# Altium PCB Main.PcbDoc
Units mil, origin at the board's own origin, x right, y up, seen from the top; angles counter-clockwise.
Board outline 2080 x 2080 mil, 2 copper layers (Top Layer, Bottom Layer), stack 12.8 mil thick; 114 components, 76 nets, 361 pads, 44 vias.
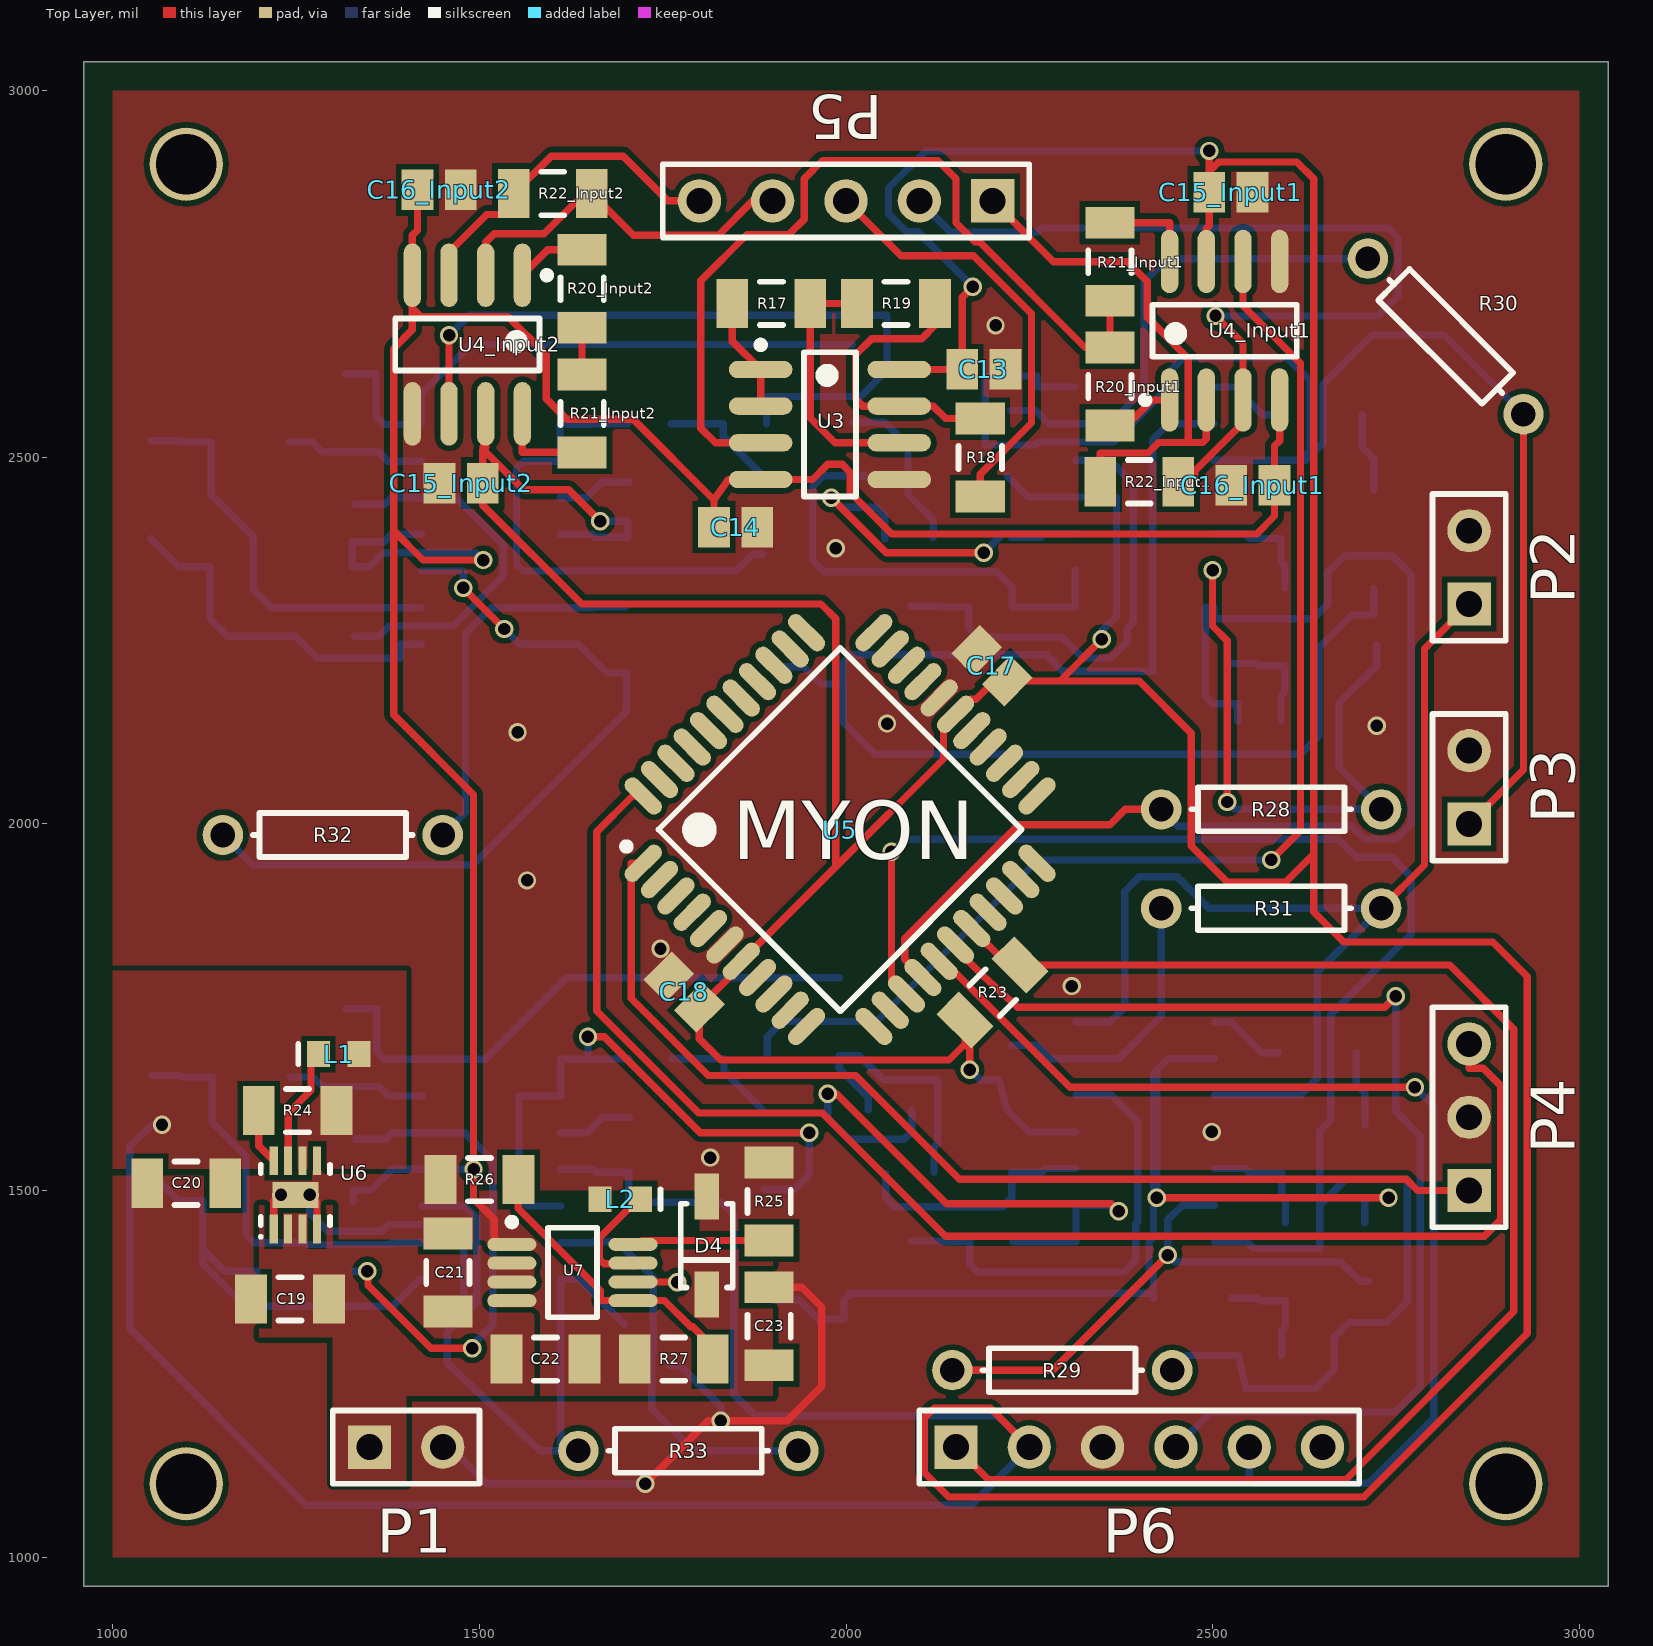
[diagram p0: Top Layer view]
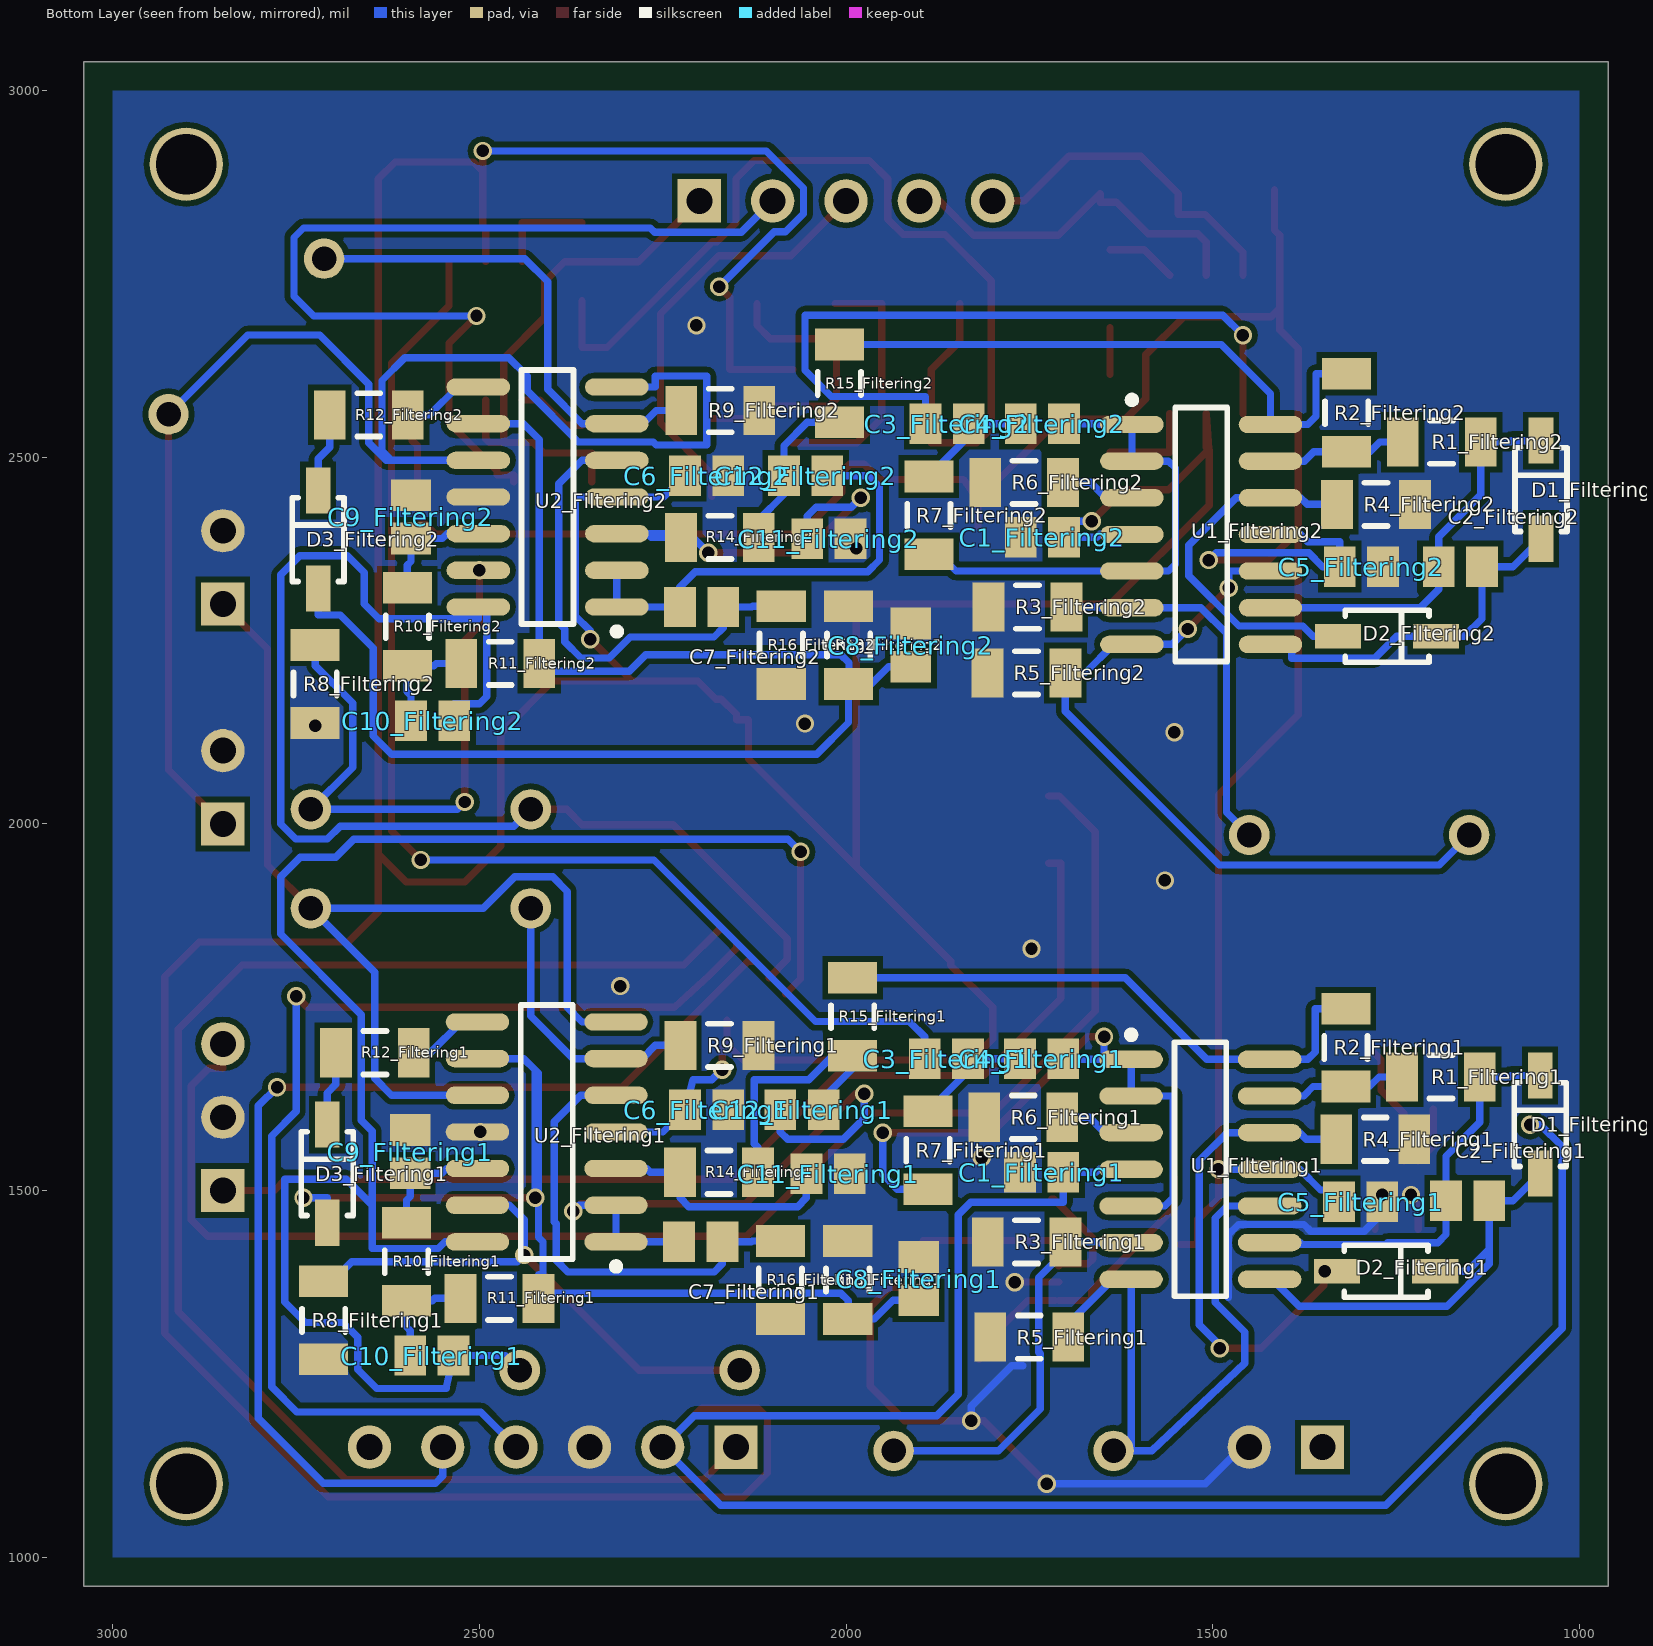
[diagram p1: Bottom Layer view, seen from below]

## Layer stack, top to bottom
Top Solder: solder mask 0.4, Solder Resist, Dk 3.5
Top Layer: signal copper 1.4
Dielectric 1: core 10, FR-4, Dk 4.2
Bottom Layer: signal copper 1.4
Solder Side: solder mask 0.4, Solder Resist, Dk 3.5

## Board outline
960,960 3040,960 3040,3040 960,3040

## Design rules (kind name [scope] priority, off if disabled: settings)
Clearance [All] p1: gap=7.5
ComponentClearance [All] p1: gap=10 collisioncheckmode=3 verticalgap=100000 showdistances=FALSE
ComponentOrientations [All] p1: allowedrotations=32
HoleSize [All] p1: absolutevalues=TRUE maxlimit=150 minlimit=1 maxpercent=80.000 minpercent=20.000
MinimumSolderMaskSliver [All] p1: minsoldermaskwidth=1
NetsToIgnore [InNet('No Net')] p1:
PermittedLayers [All] p1: toplayerpermitted=TRUE bottomlayerpermitted=TRUE
PlaneConnect [All] p1: planeconnectstyle=Direct reliefexpansion=20 reliefentries=4 reliefconductorwidth=10 reliefairgap=10
PolygonConnect [All] p1: connectstyle=Direct reliefconductorwidth=10 reliefentries=4 polygonreliefangle="90 Angle" airgapwidth=10
RoomDefinition Filtering1 [InComponentClass('Filtering1')] p1: confinementstyle=ConfineIn formatcopy=TRUE lockcomponents=FALSE outline 2765,1235 995,1235 995,1825 2765,1825
RoomDefinition Filtering2 [InComponentClass('Filtering2')] p2: confinementstyle=ConfineIn formatcopy=TRUE lockcomponents=FALSE outline 2763.89,2101 993.89,2101 993.89,2691 2763.89,2691
RoomDefinition Pos [InComponentClass('Pos')] p3: confinementstyle=ConfineIn formatcopy=TRUE lockcomponents=FALSE outline 1392,1302.32 1392,1719 1015,1719 1015,1302.32
RoomDefinition Neg [InComponentClass('Neg')] p4: confinementstyle=ConfineIn formatcopy=TRUE lockcomponents=FALSE outline 1410,1225 1945,1225 1945,1570 1410,1570
RoomDefinition Main [InComponentClass('Main')] p5: confinementstyle=ConfineOut formatcopy=TRUE lockcomponents=FALSE outline 3030,2094 3070,2094 3070,2812 3030,2812
RoomDefinition Input2 [InComponentClass('Input2')] p6: confinementstyle=ConfineIn formatcopy=TRUE lockcomponents=FALSE outline 1370,2910 1370,2425 1690,2425 1690,2910
RoomDefinition Input1 [InComponentClass('Input1')] p7: confinementstyle=ConfineIn formatcopy=TRUE lockcomponents=FALSE outline 2630,2416.85 2630,2901.85 2310,2901.85 2310,2416.85
RoomDefinition Drive [InComponentClass('Drive')] p8: confinementstyle=ConfineIn formatcopy=TRUE lockcomponents=FALSE outline 1748.15,2360 2253.15,2360 2253.15,2769 1748.15,2769
RoomDefinition Digital [InComponentClass('Digital')] p9: confinementstyle=ConfineIn formatcopy=TRUE lockcomponents=FALSE outline 1604.12,1610.88 2374.12,1610.88 2374.12,2380.88 1604.12,2380.88
RoutingVias [All] p1: holewidth=17 width=25 viastyle="Through Hole" minholewidth=17 minwidth=25 maxholewidth=17 maxwidth=25
SMDNeckDown [All] p1: percent=100.000
SilkToSilkClearance [All] p1: silktosilkclearance=2
SilkToSolderMaskClearance [IsPad] p1 off: minsilkscreentomaskgap=5 clearancetoexposedcopper=TRUE
SolderMaskExpansion [All] p1: expansion=4
ViasUnderSMD [All] p1: allowed=TRUE
Width [All] p1: maxlimit=20 minlimit=10 preferedwidth=10 minimp=50.000000 maximp=50.000000 favimp=50.000000
24 further rules are at their usual default settings.

## Classes and differential pairs
component class Drive: C13 C14 R17 R18 R19 U3
net class AI[1..2]: AI1 AI2
component class Neg: C21 C22 C23 C24 D4 L2 R25 R26 R27 U7
component class Pos: C19 C20 L1 R24 U6
channel class Filtering: F1 F2
component class Main: P1 P2 P3 P4 P5 P6 R28 R29 R30 R31 R32 R33 Vpp1
component class Digital: C17 C18 C27 R23 U5 U11
component class Filtering1: C1_Filtering1 C2_Filtering1 C3_Filtering1 C4_Filtering1 C5_Filtering1 C6_Filtering1 C7_Filtering1 C8_Filtering1 C9_Filtering1 C10_Filtering1 C11_Filtering1 C12_Filtering1 D1_Filtering1 D2_Filtering1 D3_Filtering1 R1_Filtering1 R2_Filtering1 R3_Filtering1 R4_Filtering1 R5_Filtering1 R6_Filtering1 R7_Filtering1 R8_Filtering1 R9_Filtering1 R10_Filtering1 R11_Filtering1 R12_Filtering1 R13_Filtering1 R14_Filtering1 R15_Filtering1 R16_Filtering1 U1_Filtering1 U2_Filtering1
component class Filtering2: C1_Filtering2 C2_Filtering2 C3_Filtering2 C4_Filtering2 C5_Filtering2 C6_Filtering2 C7_Filtering2 C8_Filtering2 C9_Filtering2 C10_Filtering2 C11_Filtering2 C12_Filtering2 D1_Filtering2 D2_Filtering2 D3_Filtering2 R1_Filtering2 R2_Filtering2 R3_Filtering2 R4_Filtering2 R5_Filtering2 R6_Filtering2 R7_Filtering2 R8_Filtering2 R9_Filtering2 R10_Filtering2 R11_Filtering2 R12_Filtering2 R13_Filtering2 R14_Filtering2 R15_Filtering2 R16_Filtering2 U1_Filtering2 U2_Filtering2
component class Input1: C15_Input1 C16_Input1 R20_Input1 R21_Input1 R22_Input1 U4_Input1
component class Input2: C15_Input2 C16_Input2 R20_Input2 R21_Input2 R22_Input2 U4_Input2
net class AO[1..2]: AO1 AO2
net class DI[1..2]: DI1 DI2
net class LA[1..2]: LA1 LA2
net class LB[1..2]: LB1 LB2
channel class Input: Input1 Input2
net class LD[1..2]: LD1 LD2

## Components (designator, comment, footprint, x,y, rotation, side; value= is the part's Value field where it differs from the comment)
C1_Filtering1 "Cap" C0805 1733.15,1525 r0 bottom (schematic designator C1)
C1_Filtering2 "Cap" C0805 1732.04,2391 r0 bottom (schematic designator C1)
C2_Filtering1 "C20" C0805 1152,1486 r180 bottom (schematic designator C2)
C2_Filtering2 "C20" C0805 1162.04,2351 r180 bottom (schematic designator C2)
C3_Filtering1 "C15" C0805 1863.15,1680 r180 bottom (schematic designator C3)
C3_Filtering2 "C15" C0805 1862.04,2546 r180 bottom (schematic designator C3)
C4_Filtering1 "C16" C0805 1733.15,1680 r180 bottom (schematic designator C4)
C4_Filtering2 "C16" C0805 1732.04,2546 r180 bottom (schematic designator C4)
C5_Filtering1 "Cap" C0805 1298.15,1485 r180 bottom (schematic designator C5)
C5_Filtering2 "Cap" C0805 1297.04,2351 r180 bottom (schematic designator C5)
C6_Filtering1 "Cap" C0805 2190,1610 r0 bottom (schematic designator C6)
C6_Filtering2 "Cap" C0805 2190,2475 r0 bottom (schematic designator C6)
C7_Filtering1 "C19" C0805 2198.15,1430 r0 bottom (schematic designator C7)
C7_Filtering2 "C19" C0805 2197.04,2296 r0 bottom (schematic designator C7)
C8_Filtering1 "C23" C0805 1901,1380 r270 bottom (schematic designator C8)
C8_Filtering2 "C23" C0805 1911.51,2244 r270 bottom (schematic designator C8)
C9_Filtering1 "C21" C0805 2594.47,1553 r270 bottom (schematic designator C9)
C9_Filtering2 "C21" C0805 2593.36,2419 r270 bottom (schematic designator C9)
C10_Filtering1 "C22" C0805 2565,1275 r0 bottom (schematic designator C10)
C10_Filtering2 "C22" C0805 2563.89,2141 r0 bottom (schematic designator C10)
C11_Filtering1 "C21" C0805 2024.47,1523 r0 bottom (schematic designator C11)
C11_Filtering2 "C21" C0805 2023.36,2389 r0 bottom (schematic designator C11)
C12_Filtering1 "C22" C0805 2060,1610 r180 bottom (schematic designator C12)
C12_Filtering2 "C22" C0805 2055,2475 r0 bottom (schematic designator C12)
C13 "Cap" C0805 2188.15,2620 r180 top
C14 "Cap" C0805 1849.53,2405 r180 top
C15_Input1 "Cap" C0805 2525,2861.85 r180 top (schematic designator C15)
C15_Input2 "Cap" C0805 1475,2465 r0 top (schematic designator C15)
C16_Input1 "Cap" C0805 2555,2461.85 r0 top (schematic designator C16)
C16_Input2 "Cap" C0805 1445,2865 r180 top (schematic designator C16)
C17 "Cap" C0805 2199.12,2215.88 r315 top
C18 "Cap" C0805 1779.12,1770.88 r315 top
C19 "Cap" C1206 1241.61,1352.32 r0 top
C20 "Cap" C1206 1100,1510 r0 top
C21 "Cap" C1206 1456.85,1388.15 r90 top
C22 "Cap" C1206 1590,1270 r180 top
C23 "Cap" C1206 1895,1315 r90 top
D1_Filtering1 "D2" 425 1053.15,1590 r270 bottom (schematic designator D1)
D1_Filtering2 "D2" 425 1052.04,2456 r270 bottom (schematic designator D1)
D2_Filtering1 "D3" 425 1263.15,1390 r0 bottom (schematic designator D2)
D2_Filtering2 "D3" 425 1262.04,2256 r0 bottom (schematic designator D2)
D3_Filtering1 "D4" 425 2707.62,1523 r270 bottom (schematic designator D3)
D3_Filtering2 "D4" 425 2720,2388 r270 bottom (schematic designator D3)
D4 "D Schottky" 425 1810,1425 r90 top
L1 "Inductor" INDC1608L 1308,1686 r0 top
L2 "Inductor" INDC1608L 1691.85,1488.15 r180 top
P1 "9V" HDR1X2 1350,1150 r0 top
P2 "A1" HDR1X2 2850,2300 r90 top
P3 "A2" HDR1X2 2850,2000 r90 top
P4 "Do" HDR1X3 2850,1500 r90 top
P5 "Header" HDR1X5 2200,2850 r180 top
P6 "PICkit" HDR1X6 2150,1150 r0 top
R1_Filtering1 "R20" C1206 1188.62,1655 r180 bottom (schematic designator R1)
R1_Filtering2 "R20" C1206 1187.51,2521 r180 bottom (schematic designator R1)
R2_Filtering1 "R19" C1206 1318.15,1695 r270 bottom (schematic designator R2)
R2_Filtering2 "R19" C1206 1317.04,2561 r270 bottom (schematic designator R2)
R3_Filtering1 "R13" C1206 1753.62,1430 r180 bottom (schematic designator R3)
R3_Filtering2 "R13" C1206 1752.51,2296 r180 bottom (schematic designator R3)
R4_Filtering1 "R24" C1206 1278.15,1570 r0 bottom (schematic designator R4)
R4_Filtering2 "R24" C1206 1277.04,2436 r0 bottom (schematic designator R4)
R5_Filtering1 "R25" C1206 1750,1300 r180 bottom (schematic designator R5)
R5_Filtering2 "R25" C1206 1753.89,2206 r180 bottom (schematic designator R5)
R6_Filtering1 "R15" C1206 1758.15,1600 r180 bottom (schematic designator R6)
R6_Filtering2 "R15" C1206 1757.04,2466 r180 bottom (schematic designator R6)
R7_Filtering1 "R16" C1206 1888.15,1555 r90 bottom (schematic designator R7)
R7_Filtering2 "R16" C1206 1887.04,2421 r90 bottom (schematic designator R7)
R8_Filtering1 "R26" C1206 2712.62,1323 r90 bottom (schematic designator R8)
R8_Filtering2 "R26" C1206 2724,2191 r90 bottom (schematic designator R8)
R9_Filtering1 "R18" C1206 2172.62,1698 r0 bottom (schematic designator R9)
R9_Filtering2 "R18" C1206 2171.51,2564 r0 bottom (schematic designator R9)
R10_Filtering1 "R21" C1206 2599.47,1403 r90 bottom (schematic designator R10)
R10_Filtering2 "R21" C1206 2598.36,2269 r90 bottom (schematic designator R10)
R11_Filtering1 "R22" C1206 2472.62,1353 r0 bottom (schematic designator R11)
R11_Filtering2 "R22" C1206 2471.51,2219 r0 bottom (schematic designator R11)
R12_Filtering1 "R26" C1206 2642.62,1688 r180 bottom (schematic designator R12)
R12_Filtering2 "R26" C1206 2651,2558 r180 bottom (schematic designator R12)
R13_Filtering1 "R27" C1206 1997.62,1378 r270 bottom (schematic designator R13)
R13_Filtering2 "R27" C1206 1996.51,2244 r270 bottom (schematic designator R13)
R14_Filtering1 "R21" C1206 2173.15,1525 r0 bottom (schematic designator R14)
R14_Filtering2 "R21" C1206 2172.04,2391 r0 bottom (schematic designator R14)
R15_Filtering1 "R22" C1206 1991,1737 r270 bottom (schematic designator R15)
R15_Filtering2 "R22" C1206 2008.89,2601 r270 bottom (schematic designator R15)
R16_Filtering1 "R23" C1206 2089.47,1378 r270 bottom (schematic designator R16)
R16_Filtering2 "R23" C1206 2088.36,2244 r270 bottom (schematic designator R16)
R17 "Res1" C1206 1898.15,2710 r180 top
R18 "Res1" C1206 2183.15,2500 r90 top
R19 "Res1" C1206 2068.15,2710 r180 top
R20_Input1 "Res1" C1206 2360,2596.85 r90 top (schematic designator R20)
R20_Input2 "Res1" C1206 1640,2730 r270 top (schematic designator R20)
R21_Input1 "Res1" C1206 2360,2766.85 r270 top (schematic designator R21)
R21_Input2 "Res1" C1206 1640,2560 r90 top (schematic designator R21)
R22_Input1 "Res1" C1206 2400,2466.85 r0 top (schematic designator R22)
R22_Input2 "Res1" C1206 1600,2860 r180 top (schematic designator R22)
R23 "Res1" C1206 2200,1770 r45 top
R24 "Res1" C1206 1252,1609 r0 top
R25 "Res1" C1206 1895,1485 r90 top
R26 "Res1" C1206 1500,1515 r180 top
R27 "Res1" C1206 1765,1270 r180 top
R28 "R26" AXIAL-0.3 2580,2020 r0 top
R29 "R26" AXIAL-0.3 2295,1255 r180 top
R30 "R17" AXIAL-0.3 2818,2665 r135 top
R31 "R17" AXIAL-0.3 2580,1885 r180 top
R32 "R14" AXIAL-0.3 1300,1985 r180 top
R33 "R14" AXIAL-0.3 1785,1145 r180 top
U1_Filtering1 "U7" TI-D14_N 1516.62,1529 r180 bottom (schematic designator U1)
U1_Filtering2 "U7" TI-D14_N 1515.51,2395 r180 bottom (schematic designator U1)
U2_Filtering1 "U8" TI-D14_N 2408.15,1580 r0 bottom (schematic designator U2)
U2_Filtering2 "U8" TI-D14_N 2407.04,2446 r0 bottom (schematic designator U2)
U3 "OPA2188AIDR" TI-D8_N 1978.15,2545 r0 top
U4_Input1 "INA128UA" TI-D8_N 2516.47,2672.85 r90 top (schematic designator U4)
U4_Input2 "INA128UA" TI-D8_N 1483.53,2654 r270 top (schematic designator U4)
U5 "MYON" MCHP-TQFP-PT44_N 1992.07,1992.32 r45 top
U6 "TPS62163DSGR" DSG8-1600X900TP 1249,1494 r90 top
U7 "TPS62160DGKR" DGK8_N 1626.85,1388.15 r0 top

## Footprints (in the part's own frame and the unit in brackets; to place one, negate y for a bottom-side part, rotate by r counter-clockwise, add the part's x,y. Pads: shape width x height; smd on the part's side, far side on the other; paste and mask are expansions set on the pad)
425 [mm] "SOD-123; 2 Leads; Body 2.7 x 1.6 mm, (LxW)"
  rect 1.6x0.85 smd: 1(-1.7,0) 2(1.7,0)
  silkscreen extent -1.45,-0.9 1.45,0.9
AXIAL-0.3 [mm] "Axial Device, Thru-Hole; 2 Leads; 0.3 in Pin Spacing"
  round 1.4 hole 0.85: 1(-3.81,0) 2(3.81,0)
  silkscreen extent -2.77,-0.76 2.77,0.76
C0805 [mm] "Chip Capacitor, Body 2.0x1.3mm, IPC High Density"
  rect 1.1x1.4 smd: 1(-0.75,0) 2(0.75,0)
  body extent -1.1,-0.72 1.1,0.72, height 1.4
C1206 [mm] "Chip Capacitor, Body 3.2x1.6mm, IPC High Density"
  rect 1.1x1.7 smd: 1(-1.35,0) 2(1.35,0)
  silkscreen extent -0.4,-0.75 0.4,0.75, body extent -1.7,-0.9 1.7,0.9, height 1.3
DGK8_N [mm] "TSOP, 8-Leads, Body 3x3mm, Pitch 0.65mm, IPC Medium Density"
  oval 1.7x0.45 smd: 1(-2.1,0.975) 2(-2.1,0.325) 3(-2.1,-0.325) 4(-2.1,-0.975) 5(2.1,-0.975) 6(2.1,-0.325) 7(2.1,0.325) 8(2.1,0.975)
  silkscreen extent -2.22,-1.55 0.85,1.87, body extent -1.55,-1.55 1.55,1.55, height 1.1
DSG8-1600X900TP [mm] "SON, 8-Leads, Body 2x2mm, Pitch 0.5mm, Thermal Pad 1.6x0.9mm, TI Recommended"
  rect 1x0.28 smd paste-0.14 mask+0.07: 1(-1.185,0.75) 2(-1.185,0.25) 3(-1.185,-0.25) 4(-1.185,-0.75) 5(1.185,-0.75) 6(1.185,-0.25) 7(1.185,0.25) 8(1.185,0.75)
  rect 0.9x1.6 smd paste-0.45 mask+0.07: 9(0,0)
  silkscreen extent -1.5,-1.2 1.05,1.25, body extent -1.05,-1.05 1.05,1.05, height 0.8
HDR1X2 [mm] "Connector; Header; 2 Position"
  rect 1.5x1.5 hole 0.9: 1(0,0)
  round 1.5 hole 0.9: 2(2.54,0)
  silkscreen extent -1.27,-1.27 3.81,1.27
HDR1X3 [mm] "Connector; Header; 3 Position"
  rect 1.5x1.5 hole 0.9: 1(0,0)
  round 1.5 hole 0.9: 2(2.54,0) 3(5.08,0)
  silkscreen extent -1.27,-1.27 6.35,1.27
HDR1X5 [mm] "Connector; Header; 5 Position"
  rect 1.5x1.5 hole 0.9: 1(0,0)
  round 1.5 hole 0.9: 2(2.54,0) 3(5.08,0) 4(7.62,0) 5(10.16,0)
  silkscreen extent -1.27,-1.27 11.43,1.27
HDR1X6 [mm] "Connector; Header; 6 Position"
  rect 1.5x1.5 hole 0.9: 1(0,0)
  round 1.5 hole 0.9: 2(2.54,0) 3(5.08,0) 4(7.62,0) 5(10.16,0) 6(12.7,0)
  silkscreen extent -1.27,-1.27 13.97,1.27
INDC1608L [mm] "Chip Inductor, Body 1.6x0.8mm, IPC High Density"
  rect 0.8x0.9 smd: 1(-0.7,0) 2(0.7,0)
  silkscreen extent -1.4,-0.35 -1.4,0.35, body extent -0.87,-0.48 0.87,0.48, height 0.55
MCHP-TQFP-PT44_N [mm] "QFN, 44-Leads, Body 10x10mm, Pitch 0.8mm, IPC Medium Density"
  oval 1.6x0.55 smd: 1(-5.65,4) 2(-5.65,3.2) 3(-5.65,2.4) 4(-5.65,1.6) 5(-5.65,0.8) 6(-5.65,0) 7(-5.65,-0.8) 8(-5.65,-1.6) 9(-5.65,-2.4) 10(-5.65,-3.2) 11(-5.65,-4) 23(5.65,-4) 24(5.65,-3.2) 25(5.65,-2.4) 26(5.65,-1.6) 27(5.65,-0.8) 28(5.65,0) 29(5.65,0.8) 30(5.65,1.6) 31(5.65,2.4) 32(5.65,3.2) 33(5.65,4)
  oval 0.55x1.6 smd: 12(-4,-5.65) 13(-3.2,-5.65) 14(-2.4,-5.65) 15(-1.6,-5.65) 16(-0.8,-5.65) 17(0,-5.65) 18(0.8,-5.65) 19(1.6,-5.65) 20(2.4,-5.65) 21(3.2,-5.65) 22(4,-5.65) 34(4,5.65) 35(3.2,5.65) 36(2.4,5.65) 37(1.6,5.65) 38(0.8,5.65) 39(0,5.65) 40(-0.8,5.65) 41(-1.6,5.65) 42(-2.4,5.65) 43(-3.2,5.65) 44(-4,5.65)
  silkscreen extent -5.77,-4.45 4.45,4.95, body extent -5,-5 5,5, height 1.2
TI-D8_N [mm] "SOIC, 8-Leads, Body 4.9x3.9mm, Pitch 1.27mm, IPC Medium Density"
  oval 2.2x0.6 smd: 1(-2.4,1.905) 2(-2.4,0.635) 3(-2.4,-0.635) 4(-2.4,-1.905) 5(2.4,-1.905) 6(2.4,-0.635) 7(2.4,0.635) 8(2.4,1.905)
  silkscreen extent -2.52,-2.5 0.9,2.88, body extent -2,-2.5 2,2.5, height 1.75
TI-D14_N [mm] "SOIC, 14-Leads, Body 8.65x3.9mm, Pitch 1.27mm, IPC Medium Density"
  oval 2.2x0.6 smd: 1(-2.4,3.81) 2(-2.4,2.54) 3(-2.4,1.27) 4(-2.4,0) 5(-2.4,-1.27) 6(-2.4,-2.54) 7(-2.4,-3.81) 8(2.4,-3.81) 9(2.4,-2.54) 10(2.4,-1.27) 11(2.4,0) 12(2.4,1.27) 13(2.4,2.54) 14(2.4,3.81)
  silkscreen extent -2.53,-4.4 0.9,4.78, body extent -2,-4.38 2,4.38, height 1.75

## Part data
C1_Filtering1 C1_Filtering2 C5_Filtering1 C5_Filtering2 C6_Filtering1 C6_Filtering2 C13 C14 C15_Input1 C15_Input2 C16_Input1 C16_Input2 C17 C18 C19 C20 C21 C22 C23: "Capacitor"
C2_Filtering1 C2_Filtering2 C3_Filtering1 C3_Filtering2 C4_Filtering1 C4_Filtering2 C7_Filtering1 C7_Filtering2 C8_Filtering1 C8_Filtering2 C9_Filtering1 C9_Filtering2 C10_Filtering1 C10_Filtering2 C11_Filtering1 C11_Filtering2 C12_Filtering1 C12_Filtering2: library part Cap, "Capacitor"
D1_Filtering1 D1_Filtering2 D2_Filtering1 D2_Filtering2 D3_Filtering1 D3_Filtering2: library part "Diode 1N4148", "High Conductance Fast Diode"
D4: "Schottky Diode"
P1 P2 P3: library part "Header 2", "Header, 2-Pin"
P4: library part "Header 3", "Header, 3-Pin"
P5: library part "Header 5", "Header, 5-Pin"
P6: library part "Header 6", "Header, 6-Pin"
R1_Filtering1 R1_Filtering2 R2_Filtering1 R2_Filtering2 R3_Filtering1 R3_Filtering2 R4_Filtering1 R4_Filtering2 R5_Filtering1 R5_Filtering2 R6_Filtering1 R6_Filtering2 R7_Filtering1 R7_Filtering2 R8_Filtering1 R8_Filtering2 R9_Filtering1 R9_Filtering2 R10_Filtering1 R10_Filtering2 R11_Filtering1 R11_Filtering2 R12_Filtering1 R12_Filtering2 R13_Filtering1 R13_Filtering2 R14_Filtering1 R14_Filtering2 R15_Filtering1 R15_Filtering2 R16_Filtering1 R16_Filtering2 R28 R29 R30 R31 R32 R33: library part Res1, "Resistor"
R17 R18 R19 R20_Input1 R20_Input2 R21_Input1 R21_Input2 R22_Input1 R22_Input2 R23 R24 R25 R26 R27: "Resistor"
U1_Filtering1 U1_Filtering2 U2_Filtering1 U2_Filtering2: library part OPA4180IDR, "0.1 uV/C Drift, Quad, Low Noise, Rail-to-Rail, Zero Drift Operational Amplifier, 4 to 36 V, -40 to 105 degC, 14-pin SOIC (D14), Green (RoHS & no Sb/Br)"
U3: "0.03 uV/degC, 6 uV Vos, Low Noise, Rail-to-Rail Output, Zero-Drift Operational Amplifier, 4 to 36 V, -40 to 105 degC, 8-pin SOIC (D8), Green (RoHS & no Sb/Br)"
U4_Input1 U4_Input2: "Precision, Low Power Instrumentation Amplifier, -40 to 85 degC, 8-pin SOIC (D8), Green (RoHS & no Sb/Br)"
U5: library part PIC18F46K22-I/PT, "Low-Power, High-Performance Microcontroller with XLP Technology, 64 MHz, 35 I/O, -40 to 85 degC, 44-pin TQFP (PT44), Tray"
U6: "Buck Step Down Regulator with 3 to 17 V Input and 5 V Output, -40 to 85 degC, 8-Pin WSON (DSG), Green (RoHS & no Sb/Br)"
U7: "Buck Step Down Regulator with 3 to 17 V Input and 0.9 to 6 V Output, -40 to 85 degC, 8-Pin VSSOP (DGK), Green (RoHS & no Sb/Br)"

## Free pads (board coordinates)
  round 100 hole 83: 0(1100,2900) 1(1100,1100) 1(2900,1100) 1(2900,2900)

## Via types
v1: diameter 25, hole 17, Top Layer to Bottom Layer, 44 vias

## Nets (pads, with @x,y where several pads share a name; then routed paths per layer and width w, separated by ;. In a path a pad name is that pad's centre, name@x,y a point inside that pad or via, vN(x,y) a via of type N, cw(c..) or ccw(c..) an arc to the next point about the centre after c; other vN are vias at no path point)
9V: C19.2 C21.1 C22.2 P1.1 U6.2 U6.3 U7.2 U7.3
AI1: C3_Filtering1.1 U4_Input1.6 | length 1682.4
  Top Layer w10: U4_Input1.6 2541.47,2707 2620,2628.47 2620,1991 v1(2580,1951)
  Bottom Layer w10: C3_Filtering1.1 1892.68,1709.68 1913.53,1730.53 2041.53,1730.53 2262,1951 v1(2580,1951)
AI2: C3_Filtering2.1 U4_Input2.6 | length 1007.2
  Top Layer w10: U4_Input2.6 v1(1458.53,2666.53)
  Bottom Layer w10: v1(1458.53,2666.53) 1486,2694 2056,2694 2056,2619 2020,2583 1891.57,2583 C3_Filtering2.1
AO1: P2.1 R31.1 U2_Filtering1.7 U2_Filtering1.10 | length 1491.3
  Top Layer w10: R31.1 2789,1944 2789,2239 P2.1
  Bottom Layer w10: U2_Filtering1.7 2360,1730 2380,1750 2380,1908 2400,1928 2452,1928 2495,1885 R31.1 2643,1798 2643,1653 2620,1630 U2_Filtering1.10
AO2: P3.1 R30.1 U2_Filtering2.7 U2_Filtering2.10 | length 2037.4
  Top Layer w10: P3.1 2924.07,2074.07 R30.1
  Bottom Layer w10: U2_Filtering2.7 2260,2596 2260,2611 2190,2611 2190,2517 2259,2517 2263,2521 2365,2521 2435,2591 2435,2611 2460,2636 2602,2636 2633,2605 2633,2509 2620,2496 ; U2_Filtering2.10 2620,2496 ; R30.1 2816,2667 2718,2667 2651,2600 2651,2520 2627,2496 2620,2496
DI1: C10_Filtering1.1 R29.1 U2_Filtering1.14 U5.14 | length 2386.6
  Top Layer w10: v1(2062,1962) 2062,1788.76 U5.14
  Bottom Layer w10: v1(2062,1962) 2079,1979 2671.44,1979 2696.02,1954.42 2744.58,1954.42 2771,1928 2771,1850 2661,1740 2661,1596 2646,1581 2646,1480 ; R29.1 2465,1275 C10_Filtering1.1 2545.47,1230 2640,1230 2666,1256 2666,1300 2686,1320 2737.6,1320 2765.5,1347.9 2765.5,1515.5 2681.5,1515.5 2646,1480 ; U2_Filtering1.14 2547,1430 2556,1421 2646,1421 2646,1480
DI2: C10_Filtering2.1 R28.1 U2_Filtering2.14 U5.15 | length 1754.7
  Top Layer w10: U5.15 2080,1815.3 2080,1843.3 2235.7,1999 2360,1999 2381,2020 R28.1
  Bottom Layer w10: R28.1 2453,1997 2690,1997 2707.56,1979.44 2750.44,1979.44 2771,2000 2771,2340 2745,2366 2680,2366 2657,2343 2657,2300 2637,2280 2501.53,2280 U2_Filtering2.14 2490,2296 2490,2174 2500,2164 2534.36,2164 C10_Filtering2.1
ENV_Filtering1: C8_Filtering1.2 D3_Filtering1.2 R11_Filtering1.1 R13_Filtering1.2 U2_Filtering1.9 | length 1523
  Top Layer w10: v1(2424,1490) v1(2740,1490)
  Bottom Layer w10: C8_Filtering1.2 1936,1350.47 1961.62,1324.85 R13_Filtering1.2@1997,1324.85 ; R13_Filtering1.2 R13_Filtering1.2@1997,1324.85 ; R11_Filtering1.1 R11_Filtering1.1@2419.47,1360 ; v1(2424,1490) 2424,1664.53 ; U2_Filtering1.9 2439.47,1680 2424,1664.53 ; D3_Filtering1.2 2707.62,1490 v1(2740,1490) ; R13_Filtering1.2@1997,1324.85 1997,1350 2007,1360 R11_Filtering1.1@2419.47,1360 ; R11_Filtering1.1@2419.47,1360 2419.47,1385.53 2413.33,1385.53 2413.33,1430.39 2419.47,1436.53 2419.47,1660 2424,1664.53
ENV_Filtering2: C8_Filtering2.2 D3_Filtering2.2 R11_Filtering2.1 R13_Filtering2.2 U2_Filtering2.9 | length 1947.1
  Bottom Layer w10: C8_Filtering2.2 1942,2214.47 1965.62,2190.85 R13_Filtering2.2@1996,2190.85 ; U2_Filtering2.9 2440,2546 2418.36,2524.36 R11_Filtering2.1 2418.36,2208.5 2295.5,2208.5 2273,2231 2007,2231 1996,2220 R13_Filtering2.2@1996,2190.85 ; D3_Filtering2.2 2720,2285 2690,2285 2645,2240 2645,2120 2620,2095 2040,2095 1996.51,2138.49 R13_Filtering2.2 R13_Filtering2.2@1996,2190.85
GHPF_Filtering1: R5_Filtering1.2 R33.2 U1_Filtering1.7 U1_Filtering1.10 | length 868.3
  Bottom Layer w10: U1_Filtering1.10 1480,1479 1496.44,1462.56 1496.44,1347.44 1456,1307 1456,1264.39 1582.96,1145 R33.2@1611,1145 ; R33.2 R33.2@1611,1145 ; R5_Filtering1.2@1697.5,1317.5 1636,1379 U1_Filtering1.7 1611,1379 R33.2@1611,1145
GHPF_Filtering2: R5_Filtering2.2 R32.2 U1_Filtering2.7 U1_Filtering2.10 | length 1057.6
  Top Layer w10: v1(1478,2322) v1(1534,2266)
  Bottom Layer w10: R32.2 1191,1944 1491,1944 1700.74,2153.74 R5_Filtering2.2 1674,2206 1635,2245 U1_Filtering2.7 1555,2245 v1(1534,2266) ; U1_Filtering2.10 1478,2345 v1(1478,2322)
GND: C1_Filtering1.2 C1_Filtering2.2 C5_Filtering1.2 C5_Filtering2.2 C6_Filtering1.1 C6_Filtering2.1 C8_Filtering1.1 C8_Filtering2.1 C9_Filtering1.1 C9_Filtering2.1 C11_Filtering1.1 C11_Filtering2.1 C13.1 C14.1 C15_Input1.1 C15_Input2.1 C16_Input1.1 C16_Input2.1 C17.1 C18.1 C19.1 C20.1 C21.2 C23.2 D4.2 L2.2 P1.2 P2.2 P3.2 P4.2 P6.3 R3_Filtering1.1 R3_Filtering2.1 R4_Filtering1.1 R4_Filtering2.1 R5_Filtering1.1 R5_Filtering2.1 R6_Filtering1.1 R6_Filtering2.1 R8_Filtering1.1 R8_Filtering2.1 R9_Filtering1.1 R9_Filtering2.1 R13_Filtering1.1 R13_Filtering2.1 R16_Filtering1.2 R16_Filtering2.2 R25.2 R26.2 U2_Filtering1.11 U2_Filtering2.11 U3.5 U4_Input1.5 U4_Input2.5 U5.6 U5.29 U6.1 U6.4 U6.5 U6.9 U7.6 | length 1408.6
  Top Layer w10: U6.1 1219.47,1486.47 U6.9@1229,1496 ; U6.9@1266,1496 1278.53,1483.47 U6.4 ; U7.6 1769.65,1375.35 v1(1770,1375) ; v1(1726,1100) 1812,1186 v1(1829,1186) 1920,1186 1967,1233 1967,1341.15 1940,1368.15 C23.2
  Bottom Layer w10: v1(1268.69,1494) 1268.69,1468.75 1293,1444.44 1366,1444.44 1375.37,1453.81 1464.63,1453.81 1478.44,1440 1478.44,1354.19 ; P1.2@1450,1160 1510,1100 v1(1726,1100) ; 1759,1261 1774,1261 1829,1206 v1(1829,1186)
  other v1: 1229.32,1494 1815,1545 2499,1580 2308,1779 1747,1830 1565,1923 1552,2125 2724,2134 2056,2137 1986,2376 2204,2680
GO11: R3_Filtering1.2 R33.1 U1_Filtering1.6 | length 557.3
  Bottom Layer w10: U1_Filtering1.6 1655,1429 1656,1430 R3_Filtering1.2 1700.47,1418 1737,1381.47 1737,1279.45 1735,1277.45 1735,1202 1792,1145 R33.1
GO12: R3_Filtering2.2 R32.1 U1_Filtering2.6 | length 521.1
  Bottom Layer w10: R32.1 1481,2016 1481,2260 1516,2295 U1_Filtering2.6 1654,2295 1655,2296 R3_Filtering2.2
GO21: R9_Filtering1.2 R31.2 U2_Filtering1.6 | length 382.7
  Bottom Layer w10: R9_Filtering1.2 2260,1698 2278,1680 U2_Filtering1.6 2372,1680 2430,1738 R31.2
GO22: R9_Filtering2.2 R30.2 U2_Filtering2.6 | length 674.1
  Bottom Layer w10: R9_Filtering2.2 2259,2564 2277,2546 U2_Filtering2.6 2360,2546 2407,2593 2407,2740 2438.07,2771.07 R30.2
GO31: R8_Filtering1.2 R29.2 U2_Filtering1.13 | length 767.4
  Top Layer w10: R29.2 2282,1255 v1(2439,1412)
  Bottom Layer w10: U2_Filtering1.13 2459,1480 2439,1460 v1(2439,1412) 2448,1403 2674.15,1403 2701,1376.15 R8_Filtering1.2
GO32: R8_Filtering2.2 R28.2 U2_Filtering2.13 | length 808.8
  Top Layer w10: v1(2500,2346) 2500,2270 2520,2250 v1(2520,2030)
  Bottom Layer w10: v1(2500,2346) U2_Filtering2.13 ; v1(2520,2030) 2530,2020 R28.2 2673,2077 2673,2165 2724,2216 R8_Filtering2.2
HPF_Filtering1: C4_Filtering1.2 R7_Filtering1.1 U1_Filtering1.1 U1_Filtering1.2 U1_Filtering1.5 | length 917.8
  Top Layer w10: v1(1648,1710) 1670.25,1710 1801.25,1579 v1(1950,1579)
  Bottom Layer w10: U1_Filtering1.5 1565,1479 1554,1490 1554,1629 U1_Filtering1.2 U1_Filtering1.1 U1_Filtering1.1@1648,1679 ; v1(1648,1710) U1_Filtering1.1@1648,1679 ; C4_Filtering1.2@1685.42,1680 C4_Filtering1.2@1685.97,1680 ; C4_Filtering1.2 C4_Filtering1.2@1685.97,1680 ; R7_Filtering1.1 1930,1501.85 1950,1521.85 v1(1950,1579) ; U1_Filtering1.1@1648,1679 1686.97,1679 C4_Filtering1.2@1685.97,1680
HPF_Filtering2: C4_Filtering2.2 R7_Filtering2.1 U1_Filtering2.1 U1_Filtering2.2 U1_Filtering2.5 | length 687.3
  Bottom Layer w10: C4_Filtering2.2 1656,2546 1655,2545 U1_Filtering2.1 U1_Filtering2.2 1560,2495 1550.5,2485.5 1550.5,2354.5 1560,2345 U1_Filtering2.5 1850,2345 1872.85,2367.85 R7_Filtering2.1
LA1: P5.1 R22_Input1.1 U4_Input1.2 | length 744.1
  Top Layer w10: P5.1 2283,2767 2384,2767 2411,2740 2411,2691 2467,2635 2467,2520.41 ; R22_Input1.1 2346.85,2506 2412,2506 2426.41,2520.41 2467,2520.41 ; U4_Input1.2 2491.47,2525.47 2486.41,2520.41 2467,2520.41
LA2: P5.4 R22_Input2.1 U4_Input2.2 | length 514.2
  Top Layer w10: U4_Input2.2 1508.53,2793.53 1520,2805 1588,2805 1631,2848 1653.15,2848 R22_Input2.1 1710.15,2803 1826,2803 1873,2850 P5.4
LB1: P5.2 R22_Input1.2 U4_Input1.3 | length 1310.5
  Top Layer w10: R22_Input1.2 2453.15,2476 2476,2476 2476,2482 2541.47,2547.47 U4_Input1.3 2541.47,2655.53 v1(2504,2693)
  Bottom Layer w10: P5.2 2143,2807 2261,2807 2267,2813 2740,2813 2753,2800 2753,2720 2726,2693 v1(2504,2693)
LB2: P5.5 R22_Input2.2 U4_Input2.3 | length 469.2
  Top Layer w10: U4_Input2.3 1458.53,2780 1510,2831.47 1546.85,2831.47 R22_Input2.2 1597.85,2911 1696,2911 1757,2850 P5.5
LD1: R20_Input1.2 R21_Input1.2 U3.3 | length 1153.6
  Top Layer w10: U3.3 1822,2520 1802,2540 1802,2741 1865,2804 1922,2804 1943,2825 1943,2880 1968,2905 2125,2905 2150,2880 2150,2820 2176,2794 2182,2794 2326,2650 R20_Input1.2 R21_Input1.2
LD2: R20_Input2.2 R21_Input2.2 | length 63.7
  Top Layer w10: R21_Input2.2 R20_Input2.2
LG: P5.3 R18.1 | length 595.1
  Top Layer w10: P5.3 2075,2775 2174,2775 2253,2696 2253,2547 2183,2477 2183,2446.85 R18.1
LPF_Filtering1: C7_Filtering1.2 C12_Filtering1.1 U2_Filtering1.1 U2_Filtering1.2 | length 854.9
  Top Layer w10: v1(1975,1632) 1987,1632 2137,1482 2362,1482 v1(2372,1472)
  Bottom Layer w10: v1(1975,1632) 1975,1598.58 2003.64,1569.94 2079.47,1569.94 2089.53,1580 C12_Filtering1.1 ; C7_Filtering1.2 U2_Filtering1.1 U2_Filtering1.2 2364,1480 v1(2372,1472)
LPF_Filtering2: C7_Filtering2.2 C12_Filtering2.1 U2_Filtering2.1 U2_Filtering2.2 | length 627.8
  Bottom Layer w10: C12_Filtering2.1 1969.39,2475 1954.39,2460 1954.39,2360 1970.39,2344 2205.57,2344 2226.57,2323 C7_Filtering2.2 U2_Filtering2.1 U2_Filtering2.2
MCLR: P6.1 R23.2 U5.18 | length 2055.3
  Top Layer w10: P6.1 2194,1106 2682,1106 2911,1335 2911,1720 2823.42,1807.58 R23.2 2221.35,1807.58 U5.18
NetC2_Filtering1_1: C2_Filtering1.1 D1_Filtering1.1 R1_Filtering1.2 U1_Filtering1.9 | length 566
  Bottom Layer w10: D1_Filtering1.1 1093,1656.93 1094.93,1655 R1_Filtering1.2 1135.47,1593.06 1181.53,1547 C2_Filtering1.1 1181.53,1440 1192.53,1429 1261.36,1429 1263.92,1426.44 1380.33,1426.44 1380.33,1429 U1_Filtering1.9
NetC2_Filtering1_2: C2_Filtering1.2 D1_Filtering1.2 D2_Filtering1.1 U1_Filtering1.8 | length 595.6
  Bottom Layer w10: D1_Filtering1.2 1090.22,1486 C2_Filtering1.2 1122.47,1420 ; D2_Filtering1.1 1152.47,1390 1122.47,1420 ; U1_Filtering1.8 1418.72,1379 1381.98,1342.27 1180.21,1342.27 1122.47,1400 1122.47,1420
NetC2_Filtering2_1: C2_Filtering2.1 D1_Filtering2.1 R1_Filtering2.2 U1_Filtering2.9 | length 547.6
  Bottom Layer w10: D1_Filtering2.1 1092,2522.93 1093.93,2521 R1_Filtering2.2 1134.36,2449.2 1191.57,2392 C2_Filtering2.1 1191.57,2320 1216.57,2295 U1_Filtering2.9
NetC2_Filtering2_2: C2_Filtering2.2 D1_Filtering2.2 D2_Filtering2.1 U1_Filtering2.8 | length 497.1
  Bottom Layer w10: D1_Filtering2.2 1090.11,2351 C2_Filtering2.2 1132.51,2280 1156.51,2256 D2_Filtering2.1 1249,2256 1279,2226 1392,2226 1392,2245 U1_Filtering2.8
NetC3_Filtering1_2: C3_Filtering1.2 C4_Filtering1.1 R7_Filtering1.2 | length 165.4
  Bottom Layer w10: C4_Filtering1.1 C3_Filtering1.2 1833.62,1662.68 R7_Filtering1.2
NetC3_Filtering2_2: C3_Filtering2.2 C4_Filtering2.1 R7_Filtering2.2 | length 165.4
  Bottom Layer w10: C4_Filtering2.1 C3_Filtering2.2 1832.51,2528.68 R7_Filtering2.2
NetC7_Filtering1_1: C7_Filtering1.1 R16_Filtering1.1 U2_Filtering1.5 | length 636.9
  Bottom Layer w10: R16_Filtering1.1 2128,1431.15 2129.15,1430 C7_Filtering1.1 2168.62,1400 2179.62,1389 2379.33,1389 2395.33,1405 2395.33,1454.53 2398,1457.2 2398,1594 2362,1630 U2_Filtering1.5
NetC7_Filtering2_1: C7_Filtering2.1 R16_Filtering2.1 U2_Filtering2.5 | length 661.9
  Bottom Layer w10: R16_Filtering2.1 2127,2297.15 2128.15,2296 C7_Filtering2.1 2167.51,2267.49 2180,2255 2294.5,2255 2323,2226.5 2361.5,2226.5 2383.71,2248.71 2383.71,2266 2392,2274.29 2392,2464 2360,2496 U2_Filtering2.5
NetC9_Filtering1_2: C9_Filtering1.2 R10_Filtering1.2 U2_Filtering1.12 | length 163.9
  Bottom Layer w10: U2_Filtering1.12 2545,1530 2551.53,1523.47 C9_Filtering1.2 2594.47,1492 2599.47,1487 R10_Filtering1.2
NetC9_Filtering2_2: C9_Filtering2.2 R10_Filtering2.2 U2_Filtering2.12 | length 163.9
  Bottom Layer w10: U2_Filtering2.12 2544,2396 2550.53,2389.47 C9_Filtering2.2 2593.36,2358 2598.36,2353 R10_Filtering2.2
NetC10_Filtering1_2: C10_Filtering1.2 R10_Filtering1.1 R11_Filtering1.2 | length 151.9
  Bottom Layer w10: R11_Filtering1.2 2561,1353 2564.15,1349.85 R10_Filtering1.1 2599.47,1313.94 2594.53,1309 C10_Filtering1.2
NetC10_Filtering2_2: C10_Filtering2.2 R10_Filtering2.1 R11_Filtering2.2 | length 151.9
  Bottom Layer w10: R11_Filtering2.2 2559,2219 2562.15,2215.85 R10_Filtering2.1 2598.36,2179.94 2593.42,2175 C10_Filtering2.2
NetC11_Filtering1_2: C11_Filtering1.2 R14_Filtering1.2 U2_Filtering1.3 | length 339.7
  Bottom Layer w10: C11_Filtering1.2 2054,1490 2066,1478 2214.3,1478 2226.3,1490 R14_Filtering1.2 2267,1525 2272,1530 U2_Filtering1.3
NetC11_Filtering2_2: C11_Filtering2.2 R14_Filtering2.2 U2_Filtering2.3 | length 536.5
  Top Layer w10: v1(1980,2445) 2055,2370 v1(2188,2370)
  Bottom Layer w10: v1(1980,2445) 1993,2432 2040.89,2432 2052.89,2420 C11_Filtering2.2 ; v1(2188,2370) 2214,2396 U2_Filtering2.3@2271,2396 ; R14_Filtering2.2 2266,2391 U2_Filtering2.3@2271,2396 ; U2_Filtering2.3 U2_Filtering2.3@2271,2396
NetC12_Filtering1_2: C12_Filtering1.2 R14_Filtering1.1 R15_Filtering1.2 | length 365.9
  Bottom Layer w10: C12_Filtering1.2 2030.47,1627 1991,1666.47 R15_Filtering1.2 2018,1683.85 2050.85,1651 2125,1651 2125,1564 2120,1559 R14_Filtering1.1
NetC12_Filtering2_2: C12_Filtering2.2 R14_Filtering2.1 R15_Filtering2.2 | length 228.1
  Bottom Layer w10: R15_Filtering2.2 2052.68,2547.85 2084.53,2516 C12_Filtering2.2 2084.53,2449.36 2118.89,2415 R14_Filtering2.1
NetD2_Filtering1_2: D2_Filtering1.2 R4_Filtering1.2 U1_Filtering1.12 | length 689.5
  Top Layer w10: v1@1347,1391 1348,1390 1348,1371.05 1434.05,1285 v1(1490,1285)
  Bottom Layer w10: D2_Filtering1.2 1331.08,1389 1332.08,1390 v1(1347,1390) ; R4_Filtering1.2 1372,1570 1381,1579 U1_Filtering1.12 1480,1579 1518,1541 1518,1317 1490,1289 v1(1490,1285)
NetD2_Filtering2_2: D2_Filtering2.2 R4_Filtering2.2 U1_Filtering2.12 | length 512.2
  Bottom Layer w10: D2_Filtering2.2 1363,2256 1377,2270 1464,2270 1532.5,2338.5 1532.5,2380 1467.5,2445 U1_Filtering2.12 1380,2445 1371,2436 R4_Filtering2.2
NetD3_Filtering1_1: D3_Filtering1.1 R12_Filtering1.1 | length 103
  Bottom Layer w10: R12_Filtering1.1 2695.77,1644.85 2707.62,1633 D3_Filtering1.1
NetD3_Filtering2_1: D3_Filtering2.1 R12_Filtering2.1 | length 109.6
  Bottom Layer w10: R12_Filtering2.1 2704.15,2513.85 2720,2498 D3_Filtering2.1
NetL1_1: L1.1 U6.7 | length 162.8
  Top Layer w10: U6.7 1239.16,1605.66 1270.25,1636.75 1270.25,1678.25 L1.1@1279,1687
NetL2_1: L2.1 U7.7 | length 170.3
  Top Layer w10: U7.7@1710,1400 U7.7@1707,1400 ; U7.7@1717.25,1404.68 1709.79,1397.21 U7.7@1707,1400 ; L2.1 1716.33,1488.15 1663.56,1435.38 1663.56,1406.44 1670,1400 U7.7@1707,1400
NetP4_1: P4.1 U5.1 | length 1452.3
  Top Layer w10: U5.1 1707,1946.39 1707,1762 1812,1657 2013.32,1657 2154.82,1515.5 2764,1515.5 2779.5,1500 P4.1
NetP4_3: P4.3 U5.44 | length 1966.6
  Top Layer w10: U5.44 1708.8,2038.25 1660,1989.45 1660,1745 1799.19,1605.81 1967.62,1605.81 2135.79,1437.63 2870.63,1437.63 2893,1460 2893,1643 2869,1667 2850,1667 P4.3
NetP6_4: P6.4 U5.17 | length 1557.6
  Top Layer w10: U5.17 2149.36,1830.64 2186,1794 2233.85,1750 2735,1750 v1(2750,1765)
  Bottom Layer w10: P6.4 2498,1198 2749,1198 2783.5,1232.5 2783.5,1574.5 2750,1608 v1(2750,1765)
NetP6_5: P6.5 U5.16 | length 1513.4
  Top Layer w10: U5.16 2133.77,1812.76 2305.53,1641 v1(2776,1641)
  Bottom Layer w10: P6.5 2550,1111 2560,1101 2713,1101 2801.5,1189.5 2801.5,1615.5 v1(2776,1641)
NetR1_Filtering1_1: R1_Filtering1.1 R2_Filtering1.2 U1_Filtering1.13 | length 191.1
  Bottom Layer w10: R1_Filtering1.1 1273,1655 1286.15,1641.85 R2_Filtering1.2 1363,1641.85 1375.85,1629 U1_Filtering1.13
NetR1_Filtering2_1: R1_Filtering2.1 R2_Filtering2.2 U1_Filtering2.13 | length 191.1
  Bottom Layer w10: R1_Filtering2.1 1272,2521 1285.15,2507.85 R2_Filtering2.2 1362,2507.85 1374.85,2495 U1_Filtering2.13
NetR6_Filtering1_2: R6_Filtering1.2 U1_Filtering1.3 | length 102.6
  Bottom Layer w10: U1_Filtering1.3 1647,1579 1668,1600 R6_Filtering1.2
NetR6_Filtering2_2: R6_Filtering2.2 U1_Filtering2.3 | length 102.6
  Bottom Layer w10: U1_Filtering2.3 1646,2445 1667,2466 R6_Filtering2.2
NetR12_Filtering1_2: R12_Filtering1.2 U2_Filtering1.8 | length 104.2
  Bottom Layer w10: U2_Filtering1.8 2525,1730 2567,1688 R12_Filtering1.2
NetR12_Filtering2_2: R12_Filtering2.2 U2_Filtering2.8 | length 112.1
  Bottom Layer w10: U2_Filtering2.8 2530,2596 2568,2558 R12_Filtering2.2
NetR17_1: R17.1 R19.2 U3.6 | length 355.3
  Top Layer w10: R19.2 R17.1 1951.3,2553.7 1985,2520 U3.6
NetR17_2: R17.2 U3.1 U3.2 | length 156
  Top Layer w10: R17.2 1845,2658.66 U3.1 U3.2
NetR18_2: R18.2 R19.1 U3.7 | length 396.1
  Top Layer w10: R19.1 2121.3,2680 2103.3,2662 2035,2662 2013,2640 2013,2580 2023,2570 U3.7 2119,2570 2135.85,2553.15 R18.2
NetR20_Input1_1: R20_Input1.1 U4_Input1.1 | length 95.8
  Top Layer w10: R20_Input1.1 2383,2543.7 2417.66,2578.36 U4_Input1.1
NetR20_Input2_1: R20_Input2.1 U4_Input2.1 | length 95.8
  Top Layer w10: U4_Input2.1 1593.19,2783.15 R20_Input2.1
NetR21_Input1_1: R21_Input1.1 U4_Input1.8 | length 134.1
  Top Layer w10: R21_Input1.1 2441.47,2820 U4_Input1.8
NetR21_Input2_1: R21_Input2.1 U4_Input2.8 | length 134.1
  Top Layer w10: U4_Input2.8 1558.53,2506.85 R21_Input2.1
NetR24_1: R24.1 U6.8 | length 78.8
  Top Layer w10: R24.1@1199,1611 1199,1561.13 U6.8
NetR25_1: R25.1 U7.8 | length 182.8
  Top Layer w10: U7.8@1715,1425 1721.85,1431.85 R25.1
NetR26_1: R26.1 R27.1 U7.5 | length 406.3
  Top Layer w10: R26.1@1553.15,1518.87 R26.1 1553.15,1475.48 1665.09,1363.55 1665.09,1350 U7.5@1710,1350 ; U7.5@1715,1350 1752.16,1350 1788.09,1314.07 1790.93,1314.07 1818.15,1286.85 R27.1
RECT_Filtering1: R2_Filtering1.1 R15_Filtering1.1 U1_Filtering1.14 | length 782.2
  Bottom Layer w10: R2_Filtering1.1 1360,1748.15 1360,1689 1370,1679 U1_Filtering1.14 1508,1679 1619.15,1790.15 R15_Filtering1.1
RECT_Filtering2: R2_Filtering2.1 R15_Filtering2.1 U1_Filtering2.14 | length 824.4
  Bottom Layer w10: R2_Filtering2.1 1359,2614.15 1359,2556 1370,2545 U1_Filtering2.14 1421,2587 1488.15,2654.15 R15_Filtering2.1
VDD: C1_Filtering1.1 C1_Filtering2.1 C6_Filtering1.2 C6_Filtering2.2 C13.2 C15_Input1.2 C15_Input2.2 C17.2 C18.2 C20.2 L1.2 P6.2 R23.1 R24.2 U1_Filtering1.4 U1_Filtering2.4 U2_Filtering1.4 U2_Filtering2.4 U3.8 U4_Input1.7 U4_Input2.7 U5.7 U5.28 U6.6 | length 10608.6
  Top Layer w10: v1(1665,2413) 1622,2456 1560,2456 1505.26,2510.74 ; U3.8 C13.2 2158.62,2718.62 v1(2173,2733) ; R23.1 2162.42,1700 ; v1(2169,1665) 2169,1693.42 2162.42,1700 ; P6.2 2197,1203 2120,1203 2107,1190 2107,1115 2140,1082 2706,1082 2929,1305 2929,1792 2882,1839 2679,1839 2638,1880 2638,1959 ; v1(2349,2252) 2292,2195 ; U4_Input1.7 2491.47,2812 2495.47,2816 C15_Input1.2 2495.47,2890 ; v1(2495.47,2918) 2495.47,2890 ; 1505.26,2510.74 U4_Input2.7 1508.53,2514 1505.26,2510.74 ; 1505.26,2510.74 1504.53,2510 C15_Input2.2 1504.53,2435 1639.53,2300 1966,2300 1986,2280 1986,1941.71 ; 1986,1941.71 U5.7 1857.05,1807.05 C18.2 1800,1707 1829,1678 2140.42,1678 2162.42,1700 ; 1986,1941.71 2133,2088.71 2133,2142 2149.36,2142 U5.28 2170,2170.25 2177.25,2170.25 2202,2195 C17.2 2292,2195 ; 2292,2195 2400,2195 2471,2124 2471,1970 2520,1921 2600,1921 2638,1959 ; 2495.47,2890 2508.47,2903 2615,2903 2638,2880 2638,1959
  Bottom Layer w10: v1(1067,1590) 1053,1590 1023,1560 1023,1312 1264,1071 2171,1071 P6.2 2207,1193 1876,1193 1847,1222 1847,1467 1830,1484 1703.62,1484 C1_Filtering1.1 1659,1525 1655,1529 U1_Filtering1.4 ; U1_Filtering2.4 1654,2395 1658,2391 C1_Filtering2.1 1702.51,2413 v1(1665,2413) ; v1(2169,1665) 2183,1651 2208.53,1651 C6_Filtering1.2 2249.53,1580 U2_Filtering1.4 ; v1(2173,2733) 2098.03,2807.97 2082.59,2807.97 2057.97,2832.59 2057.97,2867.41 2108.56,2918 v1(2495.47,2918) ; C6_Filtering2.2 2248.53,2446 U2_Filtering2.4 2369,2446 2369,2283.47 2349,2263.47 v1(2349,2252)
VSS: C5_Filtering1.1 C5_Filtering2.1 C14.2 C16_Input1.2 C16_Input2.2 C22.1 C23.1 D4.1 R27.2 U1_Filtering1.11 U1_Filtering2.11 U3.4 U4_Input1.4 U4_Input2.4 U7.1 U7.4 | length 3793
  Top Layer w10: C16_Input2.2 1415.47,2809.94 1408.53,2803 U4_Input2.4 1408.53,2703.5 ; v1(1505.33,2360) 1423,2360 1383,2400 ; U7.1 1520,1426.54 1520,1461 1492,1489 v1(1492,1529) 1492,2040 1383,2149 1383,2400 ; C14.2 1820,2442 ; U4_Input1.4 2591.47,2522.94 2584.53,2516 C16_Input1.2 2584.53,2420 2560.06,2395.53 2062.47,2395.53 2005.5,2452.5 2005.5,2480 1995,2490.5 1974.89,2490.5 1954.39,2470 U3.4 1840,2470 1820,2442 ; 1383,2400 1383,2648.47 1408.53,2674 1408.53,2703.5 ; 1408.53,2703.5 1420,2692.03 1538.97,2692.03 1591,2640 1591,2580 1619,2552 1710,2552 1820,2442
  Bottom Layer w10: C5_Filtering1.1 1327.68,1500.68 1352.68,1500.68 1381,1529 U1_Filtering1.11 v1(1492,1529) ; U1_Filtering2.11 1380,2395 1370,2385 1326.57,2385 C5_Filtering2.1 1350,2351 1369,2370 1495.33,2370 v1(1505.33,2360)
pads on no net: P6.6 U5.2 U5.3 U5.4 U5.5 U5.8 U5.9 U5.10 U5.11 U5.12 U5.13 U5.19 U5.20 U5.21 U5.22 U5.23 U5.24 U5.25 U5.26 U5.27 U5.30 U5.31 U5.32 U5.33 U5.34 U5.35 U5.36 U5.37 U5.38 U5.39 U5.40 U5.41 U5.42 U5.43

## Polygon pours and split planes (outlines as drawn)
9V on Top Layer "9V_L01_P008" (solid, remove dead copper, pour order 8): 1300,1100 1300,1300 1200,1300 1200,1480 1300,1480 1300,1425 1575,1425 1575,1220 1400,1220 1400,1100
VDD on Top Layer "VDD_L01_P010" (solid, remove dead copper, pour order 10): 1250,1800 1400,1800 1400,1530 1000,1530 1000,1800
VSS on Top Layer "VSS_L01_P012" (solid, remove dead copper, pour order 12): 1750,1220 1900,1220 1900,1500 1500,1500 1500,1220
GND on Top Layer "GND_L01_P014" (solid, remove dead copper, pour order 14): 1000,1000 3000,1000 3000,3000 1000,3000 1000,1800 1400,1800 1400,1530 1200,1530 1200,1480 1300,1480 1300,1400 1500,1400 1500,1500 1800,1500 1800,1400 1900,1400 1900,1300 1400,1300 1400,1100 1300,1100 1300,1300 1200,1300 1200,1520 1000,1520
GND on Bottom Layer "GND_L02_P016" (solid, remove dead copper, pour order 16): 1000,1000 1000,3000 3000,3000 3000,1000